# EAGLE board project_watering (EAGLE 9.7.0)

Size 128.39 x 115.25 mm. Coordinates in mm from the lower left corner, seen from the top.
Outline: 0,0 128.39,0 128.39,115.25 0,115.25 0,0
Copper layers (1*16): Top 0.035mm / dielectric 1.5mm / Bottom 0.035mm
Design rules "default": minimum track width 6mil, minimum drill 0.35mm, track to track 6mil, track to pad 6mil, pad to pad 6mil, via to via 6mil, smd to smd 6mil, copper to edge 40mil, drill to drill 6mil, minimum pad ring 10mil, minimum via ring 8mil, stop-mask expansion 4mil, vias tented up to drill 0mil, thermal gap 10mil

## Footprints (pad centres in the part's own frame; a part is rotated, then mirrored left to right if it is on the bottom)
MOTOR = drill 1.118 pad 3.15 octagon: + 2.54,0; - -2.54,0
RESAD1016W63L850D250B = drill 0.83 pad 1.43: 1 -5.08,0; 2 5.08,0
SEN-13322 = drill 1.016 long: 1 -2.54,0; 2 0,0; 3 2.54,0
TO92 = drill 0.813 octagon: 1 -1.27,0; 2 0,1.905; 3 1.27,0
ARDUINO-UNO-R3-SHIELD = drill 1.016 pad 1.88: 3.3V 24.13,-2.54; 5V 24.13,0; A0 24.13,12.7; A1 24.13,15.24; A2 24.13,17.78; A3 24.13,20.32; A4 24.13,22.86; A5 24.13,25.4; AREF -24.13,-13.97; D2 -24.13,20.32; D3 -24.13,17.78; D4 -24.13,15.24; D5 -24.13,12.7; D6 -24.13,10.16; D7 -24.13,7.62; D8 -24.13,3.81; D9 -24.13,1.27; D10 -24.13,-1.27; D11 -24.13,-3.81; D12 -24.13,-6.35; D13 -24.13,-8.89; GND@0 24.13,2.54; GND@1 24.13,5.08; GND@2 -24.13,-11.43; IOREF 24.13,-7.62; NC 24.13,-10.16; RES 24.13,-5.08; RX -24.13,25.4; SCL -24.13,-19.05; SDA -24.13,-16.51; TX -24.13,22.86; VIN 24.13,7.62
LEDRD254W51D580H541B = drill 0.921 pad 1.521: A -1.27,0; C 1.27,0

## Placement (x,y rotation side)
MMOTOR1  MOTOR_HDR  [MOTOR]  112.57,69.33 270 top
RRES2  330  [RESAD1016W63L850D250B]  51.14,104.07 90 top
RRESI1  4.7k  [RESAD1016W63L850D250B]  94,10.64 0 top
SENMOIST1  SEN-13322  [SEN-13322]  6.99,25.65 0 top
TNPN1  NPN  [TO92]  51.14,109.15 0 top
UAD1  ARDUINO-UNO-R3-SHIELD  [ARDUINO-UNO-R3-SHIELD]  60.01,64.75 270 top
UPHOTO1  PHOTODIODE  [LEDRD254W51D580H541B]  120.41,14.82 90 top
UTEMP1  TMP36GT9Z_TO92  [TO92]  41.21,5.83 90 top

## Library data of the parts
MMOTOR1 RRES2 RRESI1 SENMOIST1 UAD1 UPHOTO1 UTEMP1 = Tinkercad
TNPN1 = Tinkercad; CATEGORY: Transistor; SUB-CATEGORY: BJT; TYPE: NPN

## Nets
MMOTOR1_+: MMOTOR1.+ TNPN1.3
TNPN1_B: RRES2.2 TNPN1.2
UAD1_5V: SENMOIST1.1 TNPN1.1 UAD1.5V UPHOTO1.C UTEMP1.3
UAD1_A0: SENMOIST1.3 UAD1.A0
UAD1_A1: UAD1.A1 UTEMP1.2
UAD1_A2: RRESI1.2 UAD1.A2 UPHOTO1.A
UAD1_D13: RRES2.1 UAD1.D13
UAD1_GND: MMOTOR1.- RRESI1.1 SENMOIST1.2 UAD1.GND@0 UAD1.GND@1 UAD1.GND@2 UTEMP1.1

## Tracks (layer width: path | path; a pad name or v marks a point on that pad's centre or on a via)
MMOTOR1_+  (1 unrouted)
TNPN1_B  (1 unrouted)
UAD1_5V  (4 unrouted)
UAD1_A0  (1 unrouted)
UAD1_A1  (1 unrouted)
UAD1_A2  (2 unrouted)
UAD1_D13  (1 unrouted)
UAD1_GND  (6 unrouted)